# Altium PCB EC200U-PCB.PcbDoc (part 2 of 2)
Units mm, origin at the board's own origin, x right, y up, seen from the top; angles counter-clockwise.
Board outline 86.99 x 89.42 mm, 2 copper layers (Top Layer, Bottom Layer); 142 components, 97 nets, 668 pads, 129 vias.
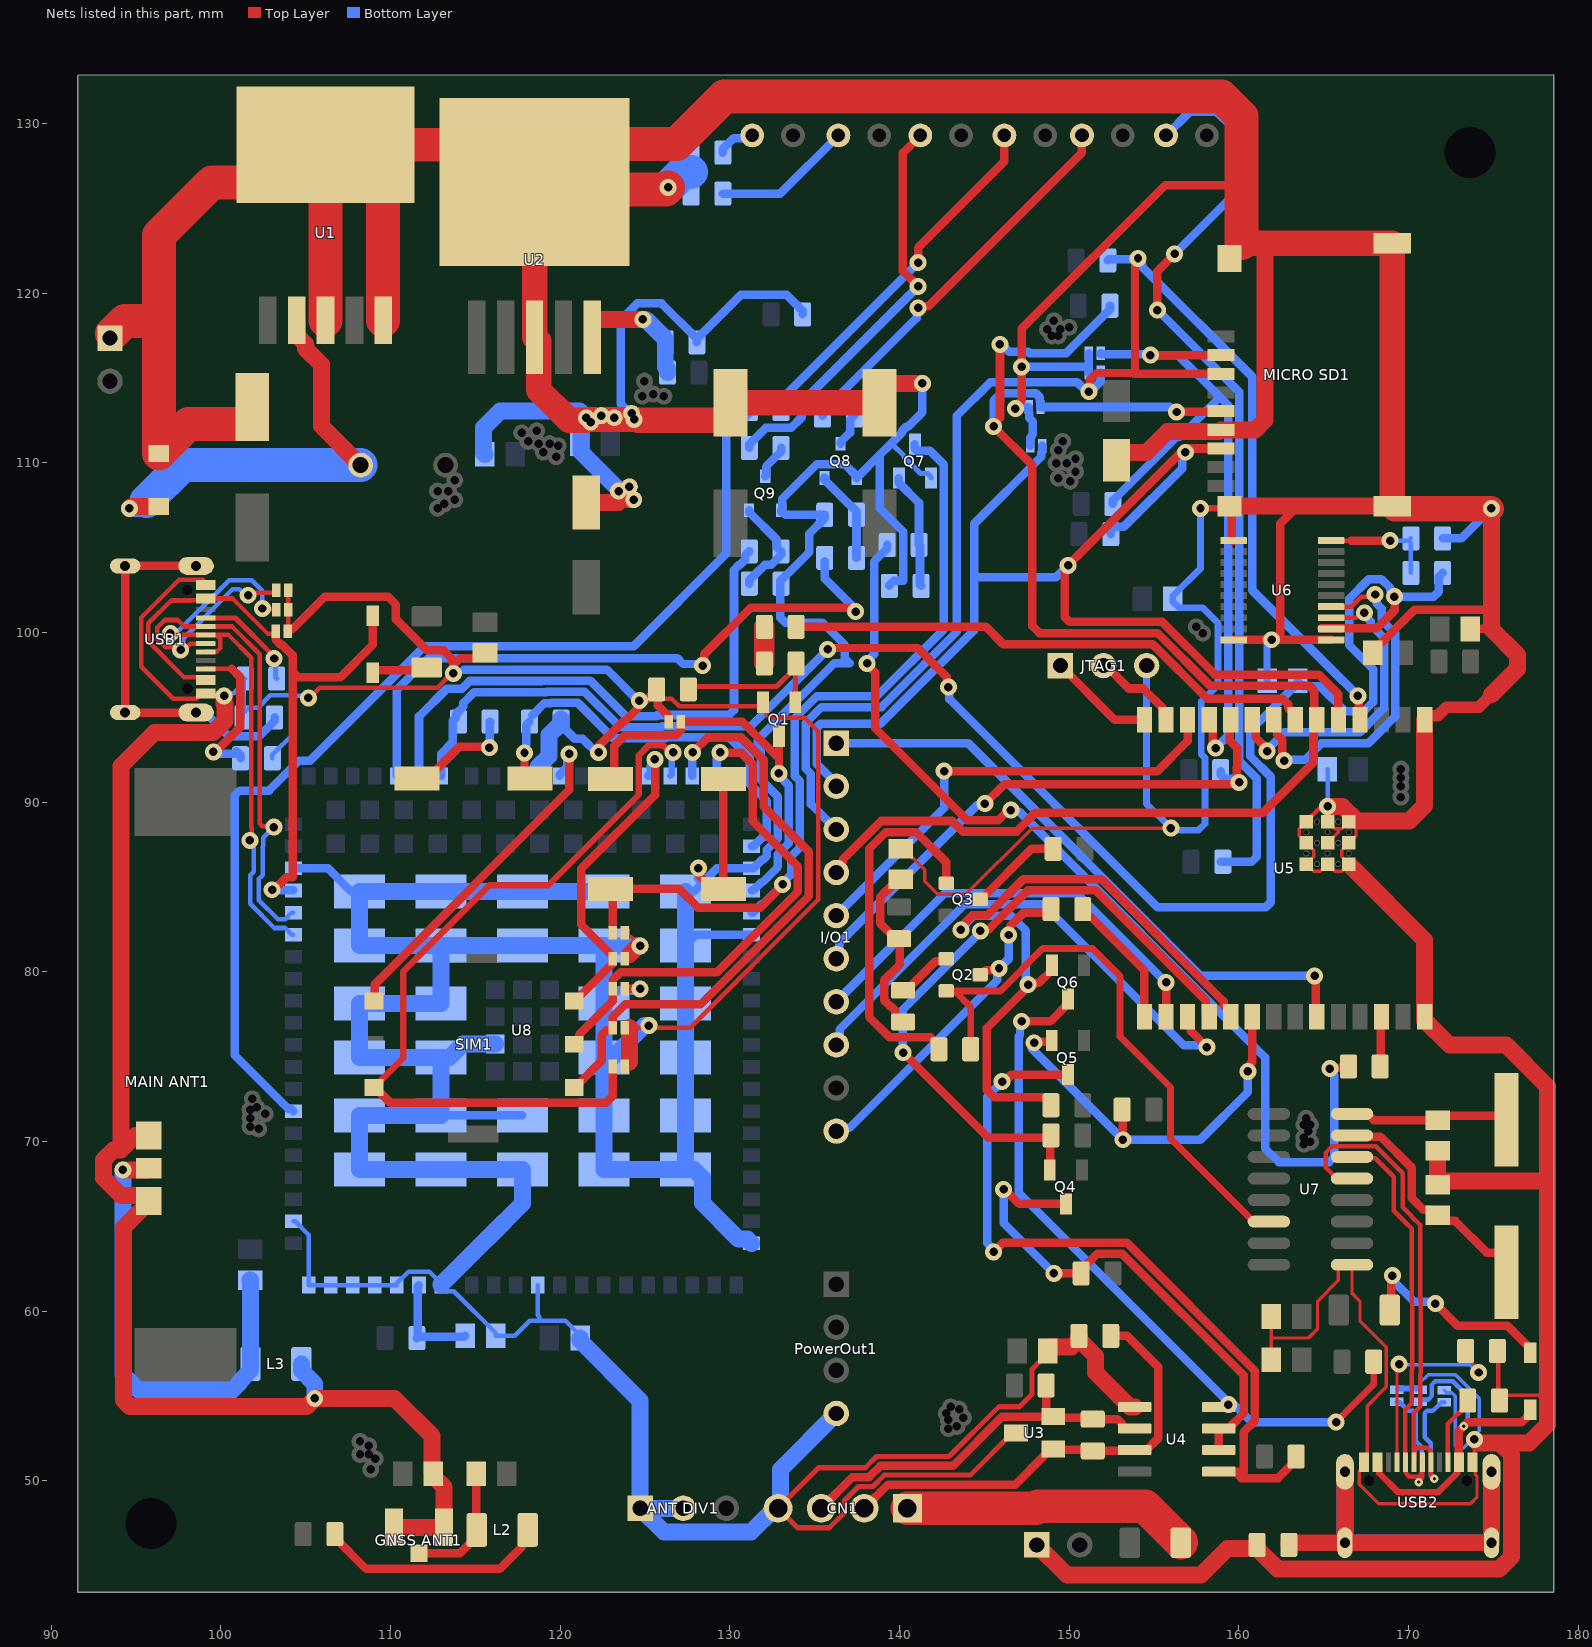
[diagram p2: the nets of this part, all layers, seen from the top]

## Via types
v1: diameter 1, hole 0.5, Top Layer to Bottom Layer, tented both sides, 126 vias
v2: diameter 0.5, hole 0.2, Top Layer to Bottom Layer, tented both sides, 3 vias

## Nets (pads, with @x,y where several pads share a name; then routed paths per layer and width w, separated by ;. In a path a pad name is that pad's centre, name@x,y a point inside that pad or via, vN(x,y) a via of type N, cw(c..) or ccw(c..) an arc to the next point about the centre after c; other vN are vias at no path point) (continued)
GND: "ANT DIV1.1" "ANT DIV1.2" "GNSS ANT1.1" "GNSS ANT1.2" "MAIN ANT1.2" "MAIN ANT1.3" "MICRO SD1.6" "MICRO SD1.10" "MICRO SD1.11" "MICRO SD1.12" "MICRO SD1.13" "Power 1.1" "Power 2.1" "POWER SW1.1" "RESET SW1.1" C1.1 C3.1 C4.2 C5.2 C6.2 C7.2 C8.2 C9.1 C10.2 C11.1 C12.1 C13.2 C14.2 C15.1 C16.2 C17.2 C18.1 C19.1 C20.1 C21.1 C22.1 C23.1 CN1.4 D1.A D2.1 D3.1 D4.1 D6.1 D7.1 D8.1 D9.1 D10.1 D11.1 D13.1 D14.1 D15.1 D16.1 D17.1 D18.1 D19.1 JTAG1.3 L3.1 pad.10 pad.11 pad.12 pad.13 pad.14 pad.15 pad.16 PowerOut1.4 Q1.2 Q7.2 Q8.2 Q9.2 R2.2 R13.1 R21.2 R22.1 R24.2 R27.2 R32.2 R35.2 R37.1 R38.2 R42.1 R43.1 R45.1 R46.1 R49.2 R50.2 R51.1 U1.3 U1.5 U1.6 U2.3 U2.6 U3.3 U4.5 U5.1 U5.28 U5.29_1 U5.29_2 U5.29_3 U5.29_4 U5.29_5 U5.29_6 U5.29_7 U5.29_8 U5.29_9 U6.1 U6.11 U6.20 U7.1 U8.8 U8.9 U8.19 U8.22 U8.36 U8.46 U8.48 U8.50 U8.51 U8.52 U8.53 U8.54 U8.56 U8.72 U8.76 U8.85 U8.86 U8.87 U8.88 U8.89 U8.90 U8.91 U8.92 U8.93 U8.94 U8.95 U8.96 U8.97 U8.98 U8.99 U8.100 U8.101 U8.102 U8.103 U8.104 U8.105 U8.106 U8.107 U8.108 U8.109 U8.110 U8.111 U8.112 USB1.A1_B12 USB1.B1_A12 USB2.A1_B12 USB2.B1_A12 | length 1108.3
  Top Layer w0.2: 93.472,117.348 93.599,117.475 93.599,117.602 ; D10.1@123.818,82.193 123.944,82.067 124.181,82.067 v1(124.714,81.534) ; D10.1@123.857,82.233 D10.1@123.921,82.296 ; C8.2@140.081,87.26 140.231,87.26 141.48,86.011 141.48,85.341 142.253,84.567 143.903,84.567 147.806,88.47 v1(155.988,88.47) ; C11.1@161.914,57.15 161.914,58.42 ; C12.1@161.914,59.69 161.914,58.42 ; U5.29_7@163.972,88.848 163.547,88.423 163.547,88.023 U5.29_8@163.972,87.598 164.397,87.173 164.397,86.773 U5.29_9@163.972,86.348 164.397,85.923 164.797,85.923 U5.29_6@165.222,86.348 165.647,85.923 166.047,85.923 U5.29_3@166.472,86.348 166.047,86.773 166.047,87.173 U5.29_2@166.472,87.598 166.897,88.023 166.897,88.423 U5.29_1@166.472,88.848 166.047,88.423 165.847,88.423 ; U5.29_5@165.222,87.598 165.847,88.223 165.847,88.423 ; U5.29_4@165.222,88.848 165.647,88.423 165.847,88.423 ; R22.1@175.352,54.737 175.67,55.055 177.634,55.055 177.78,54.909 177.78,67.678 ; 175.368,52.451 v1(173.874,52.451) 173.874,51.218 USB2.B1_A12@173.761,51.105 173.925,50.941 173.925,50.374 174.026,50.273 174.026,49.031 173.644,48.649 168.244,48.649 167.096,49.797 167.096,50.57 167.361,50.835 USB2.A1_B12@167.361,51.105 167.561,51.305 167.561,54.413 168.69,55.542 168.69,57.878 167.131,59.437 167.131,60.597 166.661,61.067 U7.1@166.661,62.738 166.092,62.738 165.861,62.507 165.861,61.827 164.631,60.597 164.631,58.953 164.098,58.42 161.914,58.42
  Top Layer w0.267: USB1.A1_B12@98.95,103.094 98.933,103.111 97.539,103.111 95.308,100.879 95.308,97.986 97.193,96.101 98.546,96.101 98.844,96.399 USB1.B1_A12@99.114,96.399 100.07,96.399 v1(100.203,96.266) ; D2.1@103.966,100.196 103.966,101.33 D3.1@103.982,101.346 D4.1@103.982,102.489 ; v1(105.156,96.139) 105.216,96.139 105.823,96.746 112.774,96.746 113.614,97.586 v1(113.701,97.586) ; D7.1@123.794,76.708 124.079,76.708 127.661,76.708 135.196,84.244 135.196,94.178 134.397,94.976 132.345,94.976 132.169,95.152 132.169,95.653 Q1.2@131.953,95.87 ; R2.2@125.684,96.445 126.051,96.079 126.585,96.079 127.01,95.653 131.737,95.653 Q1.2@131.953,95.87 ; Q1.2@131.953,95.885 Q1.2@131.953,95.87 ; U5.29_7@163.972,88.848 163.972,88.871 164.749,89.649 165.124,89.649 v1(165.227,89.752) ; C14.2@171.704,67.448 C14.2@171.958,67.448 ; R21.2@175.225,57.658 175.288,57.594 175.288,54.8 R22.1@175.352,54.737
  Top Layer w0.3: USB1.A1_B12@98.95,103.094 98.95,102.949 99.1,102.799 USB1.A1_B12@99.114,102.799 ; U3.3@146.855,52.832 146.655,52.832 144.16,50.337 139.094,50.337 138.432,49.675 137.584,49.675 136.721,48.812 136.721,48.1 135.858,47.237 133.992,47.237 CN1.4@132.842,48.387 135.23,50.775 137.977,50.775 138.639,51.437 142.916,51.437 145.848,54.369 147.07,54.369 147.816,55.115 147.816,56.596 148.728,57.508 C9.1@148.728,57.658
  Top Layer w0.4: v1(157.734,107.315) 159.313,107.315 159.437,107.439
  Top Layer w0.5: D2.1@103.951,100.076 103.951,100.196 103.966,100.196 104.221,100.196 106.133,102.108 109.855,102.108 110.325,101.638 110.325,100.774 112.163,98.936 113.129,98.936 113.605,98.46 113.605,98.297 113.701,98.201 ; v1(113.701,97.586) 113.701,98.201 ; C3.1@115.57,98.795 115.245,98.47 114.105,98.47 113.836,98.201 113.701,98.201 ; v1@122.27,93.307 123.721,94.758 123.795,94.758 v1@124.799,95.762 ; D8.1@123.794,78.994 v1(124.714,78.994) ; v1(124.662,95.975) 124.662,95.899 v1@124.799,95.762 ; R2.2@125.684,96.647 125.684,96.445 R2.2@125.684,96.437 ; D11.1@126.396,94.742 126.396,95.05 125.759,95.687 125.759,96.362 R2.2@125.684,96.437 ; v1@128.239,85.636 128.988,84.887 129.612,84.887 129.612,91.364 ; v1(146.824,113.184) 146.824,113.319 147.193,113.688 v1(147.193,115.642) 147.193,117.896 155.662,126.365 160.147,126.365 ; 159.437,107.439 159.563,107.313 159.563,105.459 159.608,105.414 U6.11@159.69,105.414 ; U6.20@159.69,99.564 v1@161.925,99.564 ; 162.433,99.564 U6.1@165.43,99.564 ; 162.433,99.568 162.433,106.423 163.449,107.439 ; C13.2@167.883,98.806 167.883,98.956 168.208,99.281 168.292,99.281 170.357,101.346 174.879,101.346 ; C16.2@173.62,100.203 174.879,100.203 ; v1@124.799,95.762 125.474,96.437 R2.2@125.684,96.437
  Top Layer w0.7: 171.513,95.093 171.725,95.093 172.225,95.593 174.143,95.593 174.879,96.329
  Top Layer w1: 95.758,70.358 94.967,70.358 94.118,69.509 ; v1(100.203,96.266) 100.203,95.807 100.244,95.766 100.244,94.792 99.556,94.104 96.093,94.104 94.118,92.129 94.118,69.509 ; 110.2,47.262 113.15,47.262 113.15,49.652 112.533,50.269 C1.1@112.533,50.419 112.458,50.494 112.458,52.642 110.236,54.864 v1(105.537,54.864) 105.046,54.373 94.648,54.373 94.267,54.754 94.267,64.932 95.508,66.173 95.508,66.823 94.111,66.823 93.084,67.85 93.084,68.924 93.67,69.509 94.118,69.509 ; C5.2@121.539,107.656 123.444,107.656 ; v1(123.444,108.331) pad.16@123.952,107.823 ; 124.079,74.676 124.079,76.708 ; 124.079,81.026 124.587,81.534 v1(124.714,81.534) ; PowerOut1.4@136.18,53.884 PowerOut1.4@136.271,53.975 ; C7.2@138.811,113.532 138.811,114.181 139.311,114.681 v1(141.351,114.681) ; 148.082,46.228 149.86,44.45 157.763,44.45 159.331,46.018 R27.2@161.071,46.018 ; C9.1@148.728,57.658 148.728,57.808 148.803,57.883 150.122,57.883 R13.1@150.576,58.337 ; R13.1@150.576,58.547 R13.1@150.576,58.337 ; C10.2@152.781,110.137 152.781,110.306 153.081,110.606 154.548,110.606 155.781,111.839 158.837,111.839 158.937,111.939 160.958,111.939 161.544,112.525 161.544,122.558 161.163,122.939 ; U4.5@153.862,54.356 153.582,54.356 151.546,56.392 151.546,57.367 R13.1@150.576,58.337 ; 159.437,107.439 163.449,107.439 169.037,107.439 ; R27.2@161.071,46.228 R27.2@161.071,46.018 ; v1(165.227,89.752) 166.11,89.752 166.962,88.9 170.053,88.9 170.942,89.789 U5.1@170.942,94.843 ; U5.29_3@166.672,86.148 170.942,81.878 U5.28@170.942,77.343 170.942,77.143 172.406,75.679 175.749,75.679 178.18,73.248 178.18,53.326 177.089,52.235 175.368,52.235 ; C14.2@171.704,67.448 C15.1@171.704,69.458 ; C14.2@171.958,67.448 172.188,67.678 177.78,67.678 ; v1(173.874,52.451) 174.09,52.235 175.368,52.235 ; 174.879,96.329 176.402,97.852 176.402,98.68 174.879,100.203 174.879,101.346 v1@174.879,107.289 ; R27.2@161.071,46.018 162.284,44.805 175.337,44.805 176.056,45.524 176.056,51.547 175.368,52.235
  Top Layer w1.5: U2.6@118.491,126.545 U2.3@118.491,117.399 118.731,117.159 118.731,114.284 120.507,112.508 pad.10@121.539,112.508 ; pad.10@121.64,112.548 v1(124.359,112.548) 124.547,112.548 124.587,112.508 129.798,112.508 130.048,112.758 C6.2@130.048,113.532 C7.2@138.811,113.532 ; 160.337,122.939 161.163,122.939 169.037,122.939 169.037,107.439 169.187,107.289 v1@174.879,107.289
  Top Layer w2: 93.599,117.602 94.361,118.364 96.349,118.364 ; C4.2@101.854,113.278 101.854,112.278 98.093,112.278 D1.A@96.349,110.534 96.349,118.364 ; U1.3@106.172,118.387 U1.6@106.172,128.737 ; U1.5@109.572,118.387 109.572,126.312 U1.6@107.147,128.737 ; v1(126.356,126.229) 126.238,126.111 118.925,126.111 U2.6@118.491,126.545 ; 160.147,122.939 160.147,126.365 160.147,130.4 158.975,131.572 129.667,131.572 126.873,128.778 120.724,128.778 U2.6@118.491,126.545 ; 96.349,118.364 96.349,123.4 99.47,126.521 103.956,126.521 U1.6@106.172,128.737 ; U1.6@106.172,128.737 U1.6@107.147,128.737 ; U1.6@107.147,128.737 116.299,128.737 U2.6@118.491,126.545
  Bottom Layer w0.2: D14.1@170.688,55.372 D15.1@169.291,55.372 169.441,55.522 170.694,55.522 170.694,55.805 171.147,56.258 172.761,56.258 174.162,54.857 174.162,52.956 173.874,52.667 v1(173.874,52.451) 173.743,52.451 173.243,51.951 172.852,51.951 172.735,52.068 172.735,54.995 172.539,55.191 172.235,55.191 D13.1@172.085,55.341
  Bottom Layer w0.267: v1(100.203,96.266) 100.343,96.406 100.761,96.406 R49.2@101.364,97.009 ; R50.2@101.3,94.996 101.3,95.198 R50.2@101.364,95.261 ; R49.2@101.427,97.282 101.364,97.218 R49.2@101.364,97.009 ; R51.1@103.043,92.583 103.043,92.793 104.292,94.042 104.292,96.266 105.029,96.266 v1(105.156,96.139) ; U8.56@104.28,65.293 104.38,65.293 105.18,64.493 U8.54@105.18,61.543 U8.53@106.48,61.543 U8.52@107.78,61.543 U8.51@109.08,61.543 U8.50@110.38,61.543 110.38,61.643 111.063,62.326 112.297,62.326 112.98,61.643 U8.48@112.98,61.562 ; 104.292,96.288 102.925,96.288 102.201,95.564 101.667,95.564 R50.2@101.364,95.261 ; U8.48@113.247,61.176 113.737,61.176 116.216,58.697 C23.1@116.216,58.547 117.327,58.547 118.209,59.428 118.745,59.428 ; U8.46@118.68,61.543 118.68,59.755 118.765,59.67 118.765,59.449 118.745,59.428 ; C21.1@121.169,58.42 121.169,58.57 120.311,59.428 118.745,59.428 ; 148.082,46.228 148.683,46.829 ; C17.2@165.216,91.948 165.227,91.937 v1(165.227,89.752) ; R50.2@101.364,95.261 R49.2@101.364,97.009
  Bottom Layer w0.3: 139.454,111.078 139.588,111.078 140.259,110.407 140.259,110.344 141.235,109.368 141.659,109.368 141.859,109.168 Q7.2@141.859,109.093
  Bottom Layer w0.4: JTAG1.3@154.559,98.044 154.559,89.899 v1(155.988,88.47) ; v1@156.083,88.519 156.246,88.356 156.474,88.356 156.481,88.348 157.625,88.348 158.003,88.726 158.003,92.599 157.773,92.829 157.773,95.898 158.77,96.895 158.77,100.546 157.86,101.456 156.469,101.456 156.094,101.831 C19.1@156.094,101.981 156.094,102.131 157.734,103.771 v1(157.734,107.315) ; C18.1@161.66,97.155 161.66,99.303 v1(161.925,99.568)
  Bottom Layer w0.5: U8.72@104.28,86.093 106.33,86.093 107.68,84.743 U8.108@108.18,84.743 ; U8.91@112.98,71.543 U8.92@117.78,71.543 ; 114.327,97.79 118.638,97.79 118.658,97.81 122.752,97.81 124.587,95.975 v1(124.662,95.975) ; U8.8@117.38,91.543 U8.9@118.68,91.543 ; R46.1@120.061,94.532 120.857,93.736 121.324,93.736 122.135,92.926 v1(122.27,92.926) ; U8.101@122.58,78.143 123.33,78.893 124.478,78.893 124.579,78.994 v1(124.714,78.994) ; pad.11@124.173,112.87 123.564,113.478 123.564,118.409 124.546,119.391 125.975,119.391 R45.1@128.062,117.304 ; U8.107@127.38,81.543 128.03,82.193 U8.22@131.28,82.193 ; U8.112@127.88,84.743 129.23,86.093 U8.19@131.28,86.093 131.38,86.093 131.88,86.593 131.946,86.593 132.18,86.827 132.18,87.208 132.83,87.858 132.83,90.319 131.83,91.319 131.83,92.99 131.638,93.182 131.638,93.674 136.14,98.176 137.072,98.176 136.779,98.469 136.779,99.256 135.451,100.584 133.262,100.584 132.969,100.877 132.969,103.034 133.265,103.33 133.272,103.33 134.69,104.748 134.69,105.824 135.59,106.724 R35.2@135.59,106.934 133.29,106.934 133.18,107.044 133.08,107.044 133.03,107.094 Q9.2@133.03,107.194 133.08,107.244 133.08,107.87 135.109,109.899 136.775,109.899 Q8.2@137.475,109.199 ; R45.1@128.062,117.094 R45.1@128.062,117.304 ; v1(128.143,86.106) 128.143,85.493 U8.112@128.397,85.493 ; R37.1@134.285,118.745 134.285,118.955 133.345,119.895 130.653,119.895 R45.1@128.062,117.304 ; Q8.2@137.475,109.099 Q8.2@137.475,109.199 ; R32.2@139.4,102.743 139.4,102.786 139.65,103.036 140.208,103.036 140.208,105.941 138.821,107.328 138.821,110.281 138.739,110.363 ; v1(141.351,114.681) 141.351,112.975 140.494,112.118 140.393,112.118 140.159,111.884 140.159,111.783 139.454,111.078 138.739,110.363 ; v1(146.824,113.184) 146.96,113.184 147.06,113.284 D19.1@147.605,113.284 147.605,112.988 147.637,112.956 147.637,112.643 147.86,112.419 147.86,111.673 147.751,111.564 147.751,111.511 147.701,111.461 D18.1@147.701,110.998 ; v1(147.193,115.642) D16.1@151.161,115.642 ; D16.1@151.161,115.316 D16.1@151.161,115.642 ; D17.1@151.161,116.459 D16.1@151.161,115.642 ; R24.2@172.004,105.537 173.101,105.537 v1(174.879,107.315) ; Q8.2@137.475,109.199 137.525,109.249 137.625,109.249 138.739,110.363
  Bottom Layer w1: L3.1@104.751,56.896 104.751,56.496 105.537,55.71 v1(105.537,54.864) ; U8.48@112.98,61.543 112.98,61.562 115.745,64.328 115.765,64.328 117.78,66.343 U8.87@117.78,68.343 U8.86@112.98,68.343 U8.85@108.18,68.343 U8.90@108.18,71.543 U8.91@112.98,71.543 U8.96@112.98,74.943 ; C22.1@115.559,110.49 115.484,110.565 115.484,112.063 116.458,113.037 121.151,113.037 v1(121.539,112.649) ; U8.76@116.18,75.743 114.28,75.743 113.48,74.943 U8.96@112.98,74.943 ; U8.9@118.68,91.543 118.68,92.062 119.341,92.723 119.341,93.946 119.927,94.532 120.061,94.532 R46.1@120.061,94.742 R46.1@120.061,94.913 ; C21.1@121.169,58.42 121.169,58.27 124.714,54.725 124.714,48.387 ; U8.111@122.58,84.743 U8.110@117.78,84.743 U8.109@112.98,84.743 U8.108@108.18,84.743 U8.103@108.18,81.543 U8.104@112.98,81.543 ; v1@123.483,108.37 pad.16@124.03,107.823 ; pad.16@124.333,107.823 pad.16@124.03,107.823 ; v1(124.359,112.548) 124.258,112.649 pad.13@123.19,112.649 v1(121.539,112.649) ; v1(124.714,81.534) 122.589,81.534 U8.106@122.58,81.543 ; v1(125.222,76.835) 124.972,76.835 123.08,74.943 U8.97@122.58,74.943 ; 127.254,48.387 124.714,48.387 ; U8.112@127.38,84.743 U8.107@127.38,81.543 U8.102@127.38,78.143 U8.98@127.38,74.943 U8.94@127.38,71.543 U8.89@127.38,68.343 ; U8.36@131.28,63.993 131.03,64.243 130.511,64.243 128.38,66.374 128.38,67.843 127.88,68.343 U8.89@127.38,68.343 ; PowerOut1.4@136.271,54.11 PowerOut1.4@136.271,53.975 132.976,50.68 132.976,48.521 CN1.4@132.842,48.387 132.653,48.387 131.253,46.987 126.114,46.987 124.714,48.387 ; U8.96@112.98,74.943 U8.95@108.18,74.943 U8.99@108.18,78.143 U8.100@112.98,78.143 U8.104@112.98,81.543 ; U8.104@112.98,81.543 U8.105@117.78,81.543 U8.106@122.58,81.543 ; v1(121.539,112.649) 121.222,112.332 121.222,110.631 pad.16@124.03,107.823 ; U8.97@122.58,74.943 U8.101@122.58,78.143 U8.106@122.58,81.543 ; U8.97@122.58,74.943 U8.93@122.58,71.543 U8.88@122.58,68.343 U8.89@127.38,68.343
  Bottom Layer w2: v1(126.356,126.229) 127.254,127.127 127.716,127.127
GPIO_N: JTAG1.2 U5.13 | length 5.3
  Top Layer w0.508: JTAG1.2@152.019,98.044 152.162,98.044 153.508,96.697 154.349,96.697 155.506,95.54 155.506,95.039 U5.13@155.702,94.843
GPIO_P: JTAG1.1 U5.14 | length 6.8
  Top Layer w0.508: JTAG1.1@149.415,98.54 149.531,98.425 JTAG1.1@149.86,98.425 ; JTAG1.1@149.479,98.044 152.68,94.843 U5.14@154.432,94.843
GPS_ON: R19.1 R33.1 | length 59.4
  Top Layer w0.5: v1(138.088,98.182) 138.088,98.108 138.557,97.639 138.557,94.361 143.999,88.919 145.807,88.919 146.423,89.535 v1(146.558,89.535) ; v1(165.354,74.295) 165.417,74.358 166.388,74.358 R19.1@166.451,74.422
  Bottom Layer w0.5: v1(138.088,98.182) 138.088,98.313 138.5,98.725 138.5,104.173 139.273,104.946 R33.1@139.273,105.156 ; v1(146.558,89.535) 146.654,89.439 147.057,89.439 161.544,74.952 161.544,69.596 162.353,68.787 165.307,68.787 165.608,69.088 165.608,73.906 165.354,74.16 v1(165.354,74.295)
GPS_RESET: R3.1 R4.2 | length 2.2
  Top Layer w1.2: R3.1@132.034,98.171 R4.2@132.034,100.33
IO8: I/O1.6 R26.2 U5.10 | length 33.3
  Top Layer w0.508: v1(145.034,89.916) 146.177,91.059 v1@160.004,91.059 ; U5.10@159.512,94.843 159.454,94.785 159.454,93.629 159.893,93.189 159.893,92.075 159.88,92.062 159.88,91.641 159.91,91.612 159.91,91.264 v1(160.004,91.17)
  Bottom Layer w0.508: I/O1.6@136.271,80.772 136.451,80.952 136.451,81.714 v1@144.559,89.822 ; R26.2@158.923,91.821 158.923,91.611 159.169,91.365 159.809,91.365 v1(160.004,91.17)
IO9: I/O1.10 Q2.3 R11.1 | length 20.7
  Top Layer w0.5: Q2.3@144.748,79.822 144.798,79.822 145.081,80.105 145.764,80.105 v1(145.859,80.2) ; v1(146.431,82.169) 146.527,82.265 146.527,82.69 147.32,83.483 148.715,83.483 R11.1@148.925,83.693
  Bottom Layer w0.5: I/O1.10@136.271,70.612 136.462,70.803 137.041,70.803 145.765,79.527 145.765,80.106 146.431,80.772 v1(146.431,82.169)
IO11: I/O1.5 U5.12 | length 27.5
  Top Layer w0.5: v1(142.621,91.821) 155.194,91.821 156.972,93.599 U5.12@156.972,94.843
  Bottom Layer w0.5: I/O1.5@136.271,83.312 142.621,89.662 v1(142.621,91.821)
KEY_POWER: "POWER SW1.2" D10.2 Q7.3 U8.21 | length 49.7
  Top Layer w0.5: D10.2@123.094,82.296 123.094,84.75 122.958,84.887 123.582,84.887 127.018,84.887 128.117,83.787 131.793,83.787 133.113,85.107 v1(133.113,85.148)
  Bottom Layer w0.5: U8.21@131.28,83.493 131.38,83.493 131.88,83.993 131.946,83.993 133.101,85.148 v1(133.113,85.148) ; v1@133.127,85.175 133.127,85.257 133.625,85.755 133.625,86.815 134.13,87.32 134.13,91.235 133.813,91.552 133.813,94.929 135.135,96.251 138.669,96.251 142.609,100.191 142.609,109.884 141.775,110.718 141.009,110.718 140.909,110.818 Q7.3@140.909,111.093
KEY_RESET: "RESET SW1.2" D11.2 Q1.3 U8.20 | length 23.9
  Top Layer w0.5: 122.958,91.364 123.19,91.596 123.19,93.307 123.835,93.952 125.97,93.952 125.98,93.942 126.812,93.942 127.096,94.226 D11.2@127.096,94.742 130.721,94.742 132.895,92.568 ; v1(132.887,91.694) 132.895,91.702 132.895,92.568 ; Q1.3@132.903,93.885 132.895,93.877 132.895,92.568
  Bottom Layer w0.5: U8.20@131.28,84.793 131.38,84.793 131.88,85.293 131.946,85.293 132.83,86.177 132.83,86.939 133.48,87.589 133.48,90.966 132.887,91.559 v1(132.887,91.694)
"MAX485 EN": Q4.2 R9.2 U5.18 | length 39.7
  Top Layer w0.5: v1(140.208,75.243) 145.22,70.231 R9.2@148.674,70.231 ; v1(144.762,82.418) 144.858,82.514 145.271,82.514 147.56,84.803 151.547,84.803 158.042,78.308 158.042,77.543 U5.18@158.242,77.343 ; Q4.2@148.849,68.326 148.887,68.364 148.887,70.32 R9.2@148.925,70.358
  Bottom Layer w0.5: v1(140.208,75.243) 140.193,75.258 140.193,77.779 144.762,82.348 v1(144.762,82.418)
"MAX485 IN": Q6.2 R10.2 U5.19 | length 42.2
  Top Layer w0.5: v1(143.613,82.472) 143.613,82.656 144.28,83.323 145.161,83.323 147.291,85.453 151.898,85.453 159.092,78.259 159.092,78.063 159.512,77.643 U5.19@159.512,77.343 ; R10.2@148.925,72.136 148.925,72.346 148.675,72.596 145.581,72.596 145.15,73.027 145.15,76.689 147.574,79.113 v1(147.574,79.248) 147.67,79.344 148.204,79.344 148.976,80.116 Q6.2@148.976,80.391
  Bottom Layer w0.5: v1(143.613,82.472) 143.613,82.542 144.389,83.318 146.555,83.318 147.447,82.426 147.447,79.502 147.574,79.375 v1(147.574,79.248)
"MAX485 OUT": Q5.2 R16.2 U5.20 | length 23.9
  Top Layer w0.5: v1(147.935,75.819) 147.998,75.882 148.907,75.882 Q5.2@148.971,75.946 ; R16.2@153.116,71.882 153.139,71.859 153.139,70.127 v1(153.162,70.104) ; v1(160.532,74.131) 160.628,74.227 160.628,74.522 160.782,74.676 U5.20@160.782,77.343
  Bottom Layer w0.5: v1(147.935,75.819) 147.839,75.723 147.839,75.512 147.797,75.469 v1(153.162,70.104) 157.717,70.104 160.532,72.919 v1(160.532,74.131)
MISO: "MICRO SD1.7" D18.2 I/O1.2 R28.1 U5.5 | length 75
  Top Layer w0.508: v1(149.929,103.955) 149.929,103.821 149.733,103.626 149.733,100.916 150.031,100.618 155.478,100.618 158.582,97.514 164.703,97.514 165.862,96.355 U5.5@165.862,94.843 ; v1@149.987,104.013 156.497,110.523 156.751,110.523 v1(156.845,110.617) ; v1@157.073,110.839 158.937,110.839
  Bottom Layer w0.508: I/O1.2@136.271,90.932 136.271,91.091 135.117,92.245 135.117,94.389 135.354,94.626 138.888,94.626 144.399,100.137 144.399,103.251 ; D18.2@148.401,110.998 148.401,110.636 148.359,110.594 148.359,110.369 144.399,106.409 144.399,103.251 ; v1(149.929,103.955) 149.225,103.251 144.399,103.251 ; R28.1@152.446,105.791 152.446,105.977 152.692,106.223 153.213,106.223 156.651,109.661 156.651,110.29 156.845,110.484 v1(156.845,110.617)
MOSI: "MICRO SD1.3" D16.2 I/O1.3 R30.1 U5.4 | length 91.2
  Top Layer w0.5: v1(151.159,114.188) 151.218,114.247 151.218,114.896 151.609,115.287 153.747,115.287 153.795,115.239 153.874,115.239 ; v1(154.051,122.047) 154.051,121.912 153.874,121.735 153.874,115.287 153.874,115.239 ; 158.937,115.239 153.874,115.239 ; v1(167.005,96.266) 167.069,96.203 167.069,94.907 U5.4@167.132,94.843
  Bottom Layer w0.5: I/O1.3@136.271,88.392 134.78,89.883 134.78,91.657 134.463,91.974 134.463,94.66 135.404,95.601 138.938,95.601 143.383,100.046 143.383,112.776 145.349,114.742 150.469,114.742 151.023,114.188 v1(151.159,114.188) ; v1@151.18,114.105 151.18,114.119 151.861,114.8 D16.2@151.861,115.316 ; R30.1@152.273,121.92 152.337,121.983 153.987,121.983 v1(154.051,122.047) 154.051,121.912 154.301,121.662 154.301,121.543 160.782,115.062 160.782,102.489 165.354,97.917 v1(167.005,96.266)
NET_MODE: R34.1 U8.5 | length 38.6
  Top Layer w0.5: v1(128.398,98.043) 128.494,98.139 128.494,98.712 131.222,101.44 137.069,101.44 137.279,101.23 v1(137.414,101.23)
  Bottom Layer w0.5: U8.5@110.38,91.543 110.38,96.634 112.232,98.486 126.898,98.486 127.245,98.139 128.302,98.139 v1(128.398,98.043) ; R34.1@135.59,104.184 135.59,103.17 137.414,101.346 v1(137.414,101.23)
NET_STATUS: R39.1 U8.6 | length 33.7
  Bottom Layer w0.508: U8.6@111.68,91.543 111.68,95.043 113.319,96.682 114.211,96.682 114.665,97.136 118.908,97.136 118.928,97.156 121.784,97.156 123.869,95.071 125.685,95.071 125.744,95.13 129.943,95.13 130.241,95.428 130.241,103.674 130.551,103.984 130.601,103.984 130.899,104.282 130.899,104.529 R39.1@131.145,104.775
NetC1_1: "MAIN ANT1.1" C24.1 L3.2 | length 27.4
  Top Layer w1: v1(94.234,68.326) 94.236,68.328 95.658,68.328 95.758,68.428
  Bottom Layer w1: v1(94.234,68.326) 94.234,56.273 95.148,55.359 100.686,55.359 101.067,55.74 101.067,55.812 101.751,56.496 L3.2@101.751,56.896 101.739,56.908 101.739,61.826 C24.1@101.727,61.838
NetC3_2: "GNSS ANT1.3" C2.2 L2.1 | length 7.5
  Top Layer w0.5: 111.675,45.737 114.106,45.737 115.086,46.717 L2.1@115.086,47.117 115.069,47.134 115.069,50.401 C2.2@115.051,50.419
NetC14_1: C8.1 R5.1 R6.2 | length 10.6
  Top Layer w0.5: R5.1@139.998,81.95 139.998,80.405 139.098,79.505 139.098,78.321 139.406,78.013 139.455,78.013 139.748,77.72 139.748,77.293 139.998,77.043 R6.2@140.208,77.043
  Top Layer w0.508: R5.1@139.976,81.95 139.766,81.95 138.862,82.854 138.862,84.414 139.221,84.773 139.244,84.773 139.931,85.46 C8.1@140.081,85.46
NetC20_1: C14.1 U7.7 Y1.2 | length 13.9
  Top Layer w0.5: U7.7@166.661,70.358 166.699,70.32 167.741,70.32 167.768,70.293 168.34,70.293 170.18,68.453 170.18,66.675 170.882,65.973 171.379,65.973 172.029,65.323 172.736,65.323 174.611,63.448 175.318,63.448 175.768,62.998 Y1.2@175.768,62.291
NetC21_2: C15.2 U7.8 Y1.1 | length 9.4
  Top Layer w0.5: U7.8@166.661,71.628 167.584,71.628 167.954,71.258 C15.2@171.704,71.258 ; C15.2@171.704,71.512 175.547,71.512 Y1.1@175.768,71.291
NetC23_2: C23.2 R48.2 U8.49 | length 6
  Bottom Layer w0.5: R48.2@111.552,58.42 111.615,58.483 114.353,58.483 C23.2@114.416,58.547 ; R48.2@111.616,58.484 111.616,61.479 U8.49@111.68,61.543
NetCN1_1: CN1.1 F2.1 | length 17.1
  Top Layer w2: CN1.1@140.462,48.387 148.03,48.387 148.148,48.505 154.46,48.505 156.572,46.393 F2.1@156.572,46.355
NetCN1_2: CN1.2 R13.2 R15.1 U3.1 U4.7 | length 26.9
  Top Layer w0.5: CN1.2@137.922,48.387 139.322,49.787 146.825,49.787 148.605,51.567 148.605,51.632 148.855,51.882 U3.1@149.055,51.882 149.111,51.826 151.328,51.826 R15.1@151.384,51.77 153.126,51.77 153.172,51.816 U4.7@153.862,51.816 154.552,51.816 155.247,52.511 155.247,56.716 153.416,58.547 R13.2@152.446,58.547
NetCN1_3: CN1.3 R8.1 R15.2 U3.2 U4.6 | length 23.1
  Top Layer w0.5: CN1.3@135.382,48.387 137.22,50.225 138.204,50.225 138.866,50.887 143.144,50.887 146.039,53.782 U3.2@149.055,53.782 149.126,53.711 151.313,53.711 R15.2@151.384,53.64 152.834,53.64 153.127,53.347 153.127,53.131 153.172,53.086 U4.6@153.862,53.086 ; R8.1@148.636,55.626 148.636,54.032 U3.2@148.886,53.782
NetD3_K: D1.K L1.2 U1.2 | length 26.5
  Top Layer w1: v1(94.615,107.315) 94.734,107.434 D1.K@96.349,107.434 D1.K@96.449,107.434 ; U1.2@104.472,118.387 104.497,118.362 104.497,117.487 104.997,116.987 104.997,116.718 105.933,115.782 105.933,112.166 L1.2@108.244,109.855
  Bottom Layer w1: v1(94.615,107.315) 95.631,107.315
  Bottom Layer w2: 95.631,107.744 97.742,109.855 L1.2@108.244,109.855
NetD12_A: D12.A D14.2 USB2.A4_B9 USB2.B4_A9 | length 19.3
  Top Layer w0.38: USB2.A4_B9@168.161,51.105 168.271,50.995 168.271,50.444 169.371,49.344 171.751,49.344 172.851,50.444 172.851,50.995 USB2.B4_A9@172.961,51.105
  Top Layer w0.5: USB2.B4_A9@172.974,51.314 172.974,51.412 172.961,51.425 172.961,52.946 173.482,53.467 176.672,53.467 177.165,53.96 D12.A@177.165,54.2
  Bottom Layer w0.267: D14.2@170.688,54.672 170.804,54.789 171.155,54.789 171.372,55.005 171.372,55.678 171.568,55.874 172.602,55.874 172.723,55.754 172.719,55.751 172.726,55.751 173.482,54.995 173.482,53.493 173.235,53.246 v2(173.235,53.22)
NetD12_C: D12.C F3.1 | length 12.6
  Top Layer w0.5: F3.1@168.891,60.071 168.964,60.144 168.964,62.03 v1(169.037,62.103) ; v1(171.577,60.452) 172.888,59.141 175.824,59.141 177.165,57.8 D12.C@177.165,57.56
  Bottom Layer w0.5: v1@168.783,62.103 v1(169.037,62.103) 169.037,61.849 170.338,60.548 171.481,60.548 v1(171.577,60.452)
NetD16_C: D5.C F1.1 | length 3.3
  Top Layer w0.5: D5.C@108.966,97.634 108.966,97.67 109.081,97.785 111.99,97.785 F1.1@112.141,97.936
"NetESP STATUS1_2": "ESP STATUS1.2" R25.1 | length 54.3
  Top Layer w0.5: v1(155.194,118.999) 155.194,121.285 v1(156.21,122.301)
  Bottom Layer w0.5: v1(155.194,118.999) 160.02,114.173 160.02,92.426 161.036,91.41 161.036,86.769 160.743,86.476 R25.1@158.92,86.476 ; 155.702,129.286 157.102,130.686 158.685,130.686 159.505,129.866 159.505,125.596 v1(156.21,122.301)
NetL2_2: L2.2 R1.1 | length 13.7
  Top Layer w0.5: R1.1@106.726,46.863 106.726,46.653 108.567,44.812 116.44,44.812 117.736,46.108 117.736,46.767 L2.2@118.086,47.117
NetLED1_2: LED2.2 R43.2 | length 2.3
  Bottom Layer w0.508: R43.2@129.586,128.27 129.586,128.48 130.221,129.115 131.147,129.115 LED2.2@131.318,129.286
NetLED2_2: LED1.2 R42.2 | length 8.2
  Bottom Layer w0.5: R42.2@129.586,125.857 132.969,125.857 LED1.2@136.398,129.286
"NetNET MODE1_2": "NET MODE1.2" R36.2 | length 23.1
  Top Layer w0.5: v1(141.098,119.125) 141.194,119.22 141.699,119.22 150.732,128.253 150.732,129.269 150.749,129.286
  Bottom Layer w0.5: R36.2@135.463,112.776 135.463,112.986 141.003,118.526 141.003,119.029 v1(141.098,119.125)
"NetNET STATUS1_2": "NET STATUS1.2" R40.2 | length 24.2
  Top Layer w0.5: v1(141.097,120.396) 140.197,121.296 140.197,128.259 141.224,129.286
  Bottom Layer w0.5: R40.2@131.145,110.871 131.145,111.081 132.111,112.047 133.607,112.047 134.239,112.679 134.239,113.538 v1(141.097,120.396)
NetQ1_1: Q9.1 R38.1 R39.2 | length 6.1
  Bottom Layer w0.5: Q9.1@131.13,107.194 131.13,107.094 132.765,105.459 132.765,105.025 R39.2@133.015,104.775 133.015,104.565 132.43,103.98 132.052,103.98 131.737,103.665 131.73,103.665 131.145,103.08 R38.1@131.145,102.87
NetQ1_3: Q9.3 R40.1 | length 2
  Bottom Layer w0.5: Q9.3@132.08,109.214 132.13,109.264 132.13,109.776 133.015,110.661 R40.1@133.015,110.871
NetQ2_1: Q8.1 R34.2 R35.1 | length 5.5
  Bottom Layer w0.508: Q8.1@135.575,109.099 135.575,108.999 137.184,107.39 137.214,107.39 137.46,107.144 R35.1@137.46,106.934 R34.2@137.46,104.394
NetQ2_3: Q8.3 R36.1 | length 2
  Bottom Layer w0.5: Q8.3@136.525,111.119 136.525,111.219 137.083,111.777 137.083,112.526 R36.1@137.333,112.776
NetQ3_1: Q7.1 R32.1 R33.2 | length 6.9
  Bottom Layer w0.508: Q7.1@139.959,109.093 139.959,108.818 141.143,107.634 R33.2@141.143,105.156 141.206,105.093 141.206,102.806 R32.1@141.27,102.743
NetQ4_1: Q1.1 R2.1 R3.2 | length 9.2
  Top Layer w0.3: R2.1@127.554,96.647 127.717,96.81 132.753,96.81 R3.2@133.879,97.936 ; R3.2@133.777,98.171 R3.2@133.817,98.13 ; Q1.1@133.853,95.885 133.879,95.91 R3.2@133.879,97.936 ; R3.2@133.904,98.171 133.879,98.146 R3.2@133.879,97.936
NetQ5_3: Q4.3 R14.2 U4.2 U4.3 | length 30.4
  Top Layer w0.5: v1(146.135,67.183) 146.189,67.183 147.046,66.326 Q4.3@149.799,66.326 ; v1(149.098,62.23) R14.2@150.703,62.23 150.703,62.44 151.643,63.38 153.125,63.38 160.274,56.231 160.274,53.975 159.547,53.248 159.547,53.131 159.502,53.086 U4.3@158.812,53.086 U4.2@158.812,51.816
  Bottom Layer w0.5: v1(146.135,67.183) 146.135,65.193 v1(149.098,62.23)
NetQ6_3: Q5.3 R17.2 U4.1 | length 45.4
  Top Layer w0.5: v1(145.542,63.5) 145.555,63.5 146.085,64.03 153.395,64.03 160.939,56.486 160.939,53.541 160.274,52.876 160.274,50.546 U4.1@159.766,50.546 ; v1(146.05,73.533) 146.185,73.533 146.582,73.93 149.821,73.93 149.837,73.946 Q5.3@149.921,73.946 ; U4.1@158.812,50.546 U4.1@159.766,50.546 ; R17.2@163.368,51.435 163.368,51.225 162.308,50.165 160.147,50.165 U4.1@159.766,50.546
  Bottom Layer w0.5: v1(145.542,63.5) 145.542,63.635 145.161,64.016 145.161,72.644 v1(146.05,73.533)
NetQ7_3: Q6.3 R18.2 U4.4 | length 42.1
  Top Layer w0.4: v1(165.73,53.462) 167.94,55.672 R18.2@167.94,57.023
  Top Layer w0.5: v1(147.193,77.078) 148.888,77.078 149.826,78.016 149.826,78.291 Q6.3@149.926,78.391
  Bottom Layer w0.5: v1(147.193,77.078) 147.097,76.982 147.097,76.254 147.035,76.192 147.035,66.96 159.374,54.621 v1(159.374,54.494) ; v1@159.7,54.494 160.732,53.462 v1(165.73,53.462)
NetQ8_1: Q2.1 R6.1 | length 3.3
  Top Layer w0.5: R6.1@140.208,78.913 140.418,78.913 142.127,80.622 142.598,80.622 Q2.1@142.748,80.772
NetQ9_1: Q3.1 R7.1 | length 21.9
  Top Layer w0.5: R7.1@142.321,75.438 142.321,75.648 141.826,76.143 139.406,76.143 138.208,77.341 138.208,87.245 138.956,87.993 138.956,88.001 139.19,88.235 140.972,88.235 142.748,86.459 Q3.1@142.748,85.217
NetQ9_3: Q3.3 R12.2 | length 5.7
  Top Layer w0.5: Q3.3@144.748,84.267 144.798,84.267 147.78,87.249 R12.2@149.208,87.249
NetR1_2: R41.2 STATUS1.2 | length 21.6
  Top Layer w0.5: v1(141.097,121.793) 141.097,122.682 146.177,127.762 STATUS1.2@146.177,129.286
  Bottom Layer w0.5: R41.2@133.015,113.157 133.265,113.407 133.265,113.961 v1(141.097,121.793)
NetR20_1: R44.1 R45.2 U2.5 | length 7.9
  Top Layer w1: U2.5@121.891,117.399 121.891,118.481 121.891,118.462 121.901,118.452 v1(124.88,118.452)
  Bottom Layer w1: v1(124.88,118.452) 125.044,118.452 126.192,117.304 126.192,115.653 126.319,115.526 R44.1@126.319,115.316
NetR29_2: R19.2 U5.26 | length 3
  Top Layer w0.5: R19.2@168.321,74.422 168.361,74.463 168.361,77.302 U5.26@168.402,77.343
NetR30_1: R4.1 U5.7 | length 32
  Top Layer w0.5: R4.1@133.904,100.33 145.083,100.33 146.107,99.306 154.923,99.306 158.126,96.103 162.557,96.103 162.902,95.759 162.902,95.563 163.322,95.143 U5.7@163.322,94.843
NetR33_2: R11.2 U5.15 | length 8
  Top Layer w0.5: R11.2@150.795,83.693 150.795,83.483 151.045,83.233 151.272,83.233 154.432,80.073 U5.15@154.432,77.343
NetR41_1: R23.1 R24.1 U6.10 | length 6.5
  Top Layer w0.267: U6.10@165.43,105.414 166.62,105.414
  Top Layer w0.5: 166.62,105.414 168.906,105.414 v1(168.91,105.41)
  Bottom Layer w0.267: v1(168.91,105.41) 170.007,105.41 R24.1@170.134,105.537 ; R23.1@170.134,103.505 170.134,103.715 R24.1@170.134,105.283
NetR43_2: R22.2 USB2.B5 | length 4.1
  Top Layer w0.267: USB2.B5@172.311,51.105 172.311,53.356 173.482,54.527 R22.2@173.482,54.737
NetR44_1: R21.1 USB2.A5 | length 12.3
  Top Layer w0.2: USB2.A5@169.311,51.105 169.311,56.755 v1(169.44,56.884) ; R21.1@173.355,57.658 173.74,57.273 173.74,56.921 174.117,56.543 v1(174.117,56.388)
  Bottom Layer w0.2: v1(169.44,56.884) 169.482,56.842 173.605,56.842 174.06,56.388 v1(174.117,56.388)
NetR45_1: R27.1 USB2.SH1 USB2.SH2 USB2.SH3 USB2.SH4 | length 37.4
  Top Layer w1: R27.1@162.941,46.228 162.941,46.355 USB2.SH3@166.241,46.355 ; USB2.SH1@166.241,50.535 USB2.SH3@166.241,46.355 ; USB2.SH2@174.881,50.535 USB2.SH4@174.881,46.355 USB2.SH3@166.241,46.355
  Bottom Layer w0.5: USB2.SH1@166.241,50.535 USB2.SH1@166.243,50.537
  Bottom Layer w1: USB2.SH1@166.241,50.535 USB2.SH3@166.241,46.355 USB2.SH4@174.881,46.355 USB2.SH2@174.881,50.535
NetR46_2: "USB BOOT SW1.1" R47.2 | length 6.6
  Top Layer w0.508: 111.561,91.389 112.185,91.389 114.054,93.258 115.784,93.258 v1(115.824,93.218)
  Bottom Layer w0.508: v1(115.824,93.218) 115.847,93.241 115.847,94.719 R47.2@115.87,94.742
NetR47_2: "USB BOOT SW1.2" R46.2 U8.115 | length 24.2
  Top Layer w0.5: v1(117.898,92.907) 117.898,91.707 118.215,91.389
  Bottom Layer w0.5: v1(117.898,92.907) 117.994,93.002 117.994,94.545 R46.2@118.191,94.742 ; R46.2@118.362,95.123 119.071,95.832 119.449,95.832 119.469,95.852 121.034,95.852 123.12,93.767 126.225,93.767 126.284,93.826 129.959,93.826 131.18,92.605 131.18,91.05 132.18,90.05 132.18,88.127 131.946,87.893 131.88,87.893 131.38,87.393 U8.115@131.28,87.393
NetR49_2: R51.2 USB1.B5 | length 9.4
  Top Layer w0.267: USB1.B5@99.114,97.849 99.131,97.866 100.635,97.866
  Top Layer w0.5: v1(99.57,92.954) 99.679,92.954 101.144,94.42 101.144,97.357 100.635,97.866
  Bottom Layer w0.5: v1(99.57,92.954) 99.666,92.858 100.923,92.858 100.923,92.995 101.173,92.745 R51.2@101.173,92.583
NetR50_1: R49.1 USB1.A5 | length 6.3
  Top Layer w0.3: USB1.A5@99.114,100.849 100.869,100.849 103.148,98.57 v1(103.148,98.463)
  Bottom Layer w0.3: v1(103.148,98.463) 103.223,98.389 103.223,97.356 R49.1@103.297,97.282
NetR51_1: R50.1 USB1.SH1 USB1.SH2 USB1.SH3 USB1.SH4 | length 22.8
  Top Layer w0.5: USB1.SH2@98.544,95.279 USB1.SH4@94.364,95.279 USB1.SH3@94.364,103.919 USB1.SH1@98.544,103.919
  Bottom Layer w0.5: USB1.SH2@98.544,95.279 99.069,95.279 100.462,93.886 102.27,93.886 103.17,94.786 R50.1@103.17,94.996
ONEWIRE: I/O1.1 U5.23 | length 36.3
  Top Layer w0.5: v1(164.465,79.756) 164.528,79.692 164.528,77.406 U5.23@164.592,77.343
  Bottom Layer w0.5: I/O1.1@136.271,93.472 144.048,93.472 157.764,79.756 v1(164.465,79.756)
RTS: Q2.2 R7.2 U7.14 | length 34.4
  Top Layer w0.4: Q2.2@142.748,78.872 143.251,78.872 ; R7.2@144.191,75.438 144.191,77.932 143.251,78.872 ; U7.14@161.761,65.278 160.861,65.278 155.963,70.176 155.963,73.198 152.982,76.179 152.982,79.755 151.371,81.366 148.431,81.366 145.937,78.872 143.251,78.872
RX_MAIN: U5.8 U6.4 | length 20.8
  Top Layer w0.267: U6.4@165.43,101.514 166.616,101.514 167.196,102.095 167.881,102.095 v1(168.021,102.235)
  Top Layer w0.5: U5.8@162.052,94.843 162.252,94.643 162.252,93.985 162.56,93.677 162.56,92.542 v1(162.655,92.446)
  Bottom Layer w0.5: v1(162.655,92.446) 162.695,92.485 163.888,92.485 164.859,93.456 167.622,93.456 169.205,95.04 169.205,99.938 168.408,100.735 168.408,101.41 168.117,101.701 168.117,102.139 v1(168.021,102.235)
SCK: "MICRO SD1.5" D19.2 I/O1.4 R29.1 U5.6 | length 95.6
  Top Layer w0.508: I/O1.4@136.271,85.852 136.271,86.12 136.642,86.491 136.642,86.604 138.302,88.264 138.302,88.272 138.919,88.889 143.104,88.889 143.728,88.265 146.888,88.265 147.998,89.374 161.419,89.374 164.396,92.351 164.396,94.647 U5.6@164.592,94.843 164.433,95.002 164.433,96.558 164.135,96.856 158.31,96.856 155.206,99.96 148.243,99.96 147.829,100.374 147.829,109.854 v1(145.542,112.141) 145.542,112.274 145.92,112.652 145.92,116.962 v1(145.912,116.97) ; v1(156.326,112.989) 156.351,113.014 158.912,113.014 158.937,113.039
  Bottom Layer w0.508: v1@145.542,112.186 145.542,113.658 145.972,114.088 148.022,114.088 148.259,113.851 148.259,113.626 148.301,113.584 148.301,113.288 D19.2@148.305,113.284 ; v1(145.912,116.97) 146.032,116.97 146.456,116.546 147.567,116.546 147.654,116.459 149.816,116.459 152.4,119.043 R29.1@152.4,119.253 ; D19.2@148.309,113.284 155.909,113.284 156.204,112.989 v1(156.326,112.989)
SCL: I/O1.7 U5.16 | length 26.3
  Top Layer w0.5: U5.16@155.702,77.343 v1(155.702,79.375)
  Bottom Layer w0.5: I/O1.7@136.271,78.232 142.657,84.618 150.459,84.618 v1(155.702,79.375)
SD_CS: "MICRO SD1.2" D17.2 R31.1 U5.11 | length 44.4
  Top Layer w0.5: v1(154.774,116.336) 158.387,116.336 158.937,116.339 ; U5.11@158.242,94.843 158.442,94.643 158.442,93.497 158.623,93.316 v1(158.623,93.181)
  Bottom Layer w0.5: D17.2@151.861,116.459 151.861,116.395 154.714,116.395 v1(154.774,116.336) 156.415,116.336 158.877,113.873 ; R31.1@152.573,107.569 152.573,107.779 156.311,111.517 156.521,111.517 158.877,113.873 ; v1(158.623,93.181) 159.37,93.928 159.37,113.38 158.877,113.873
SDA: I/O1.8 U5.17 | length 31.4
  Top Layer w0.5: U5.17@156.972,77.343 156.972,77.043 157.172,76.843 157.172,76.508 v1(158.115,75.565)
  Bottom Layer w0.5: I/O1.8@136.271,75.692 136.462,75.883 136.462,76.594 143.836,83.968 148.442,83.968 156.751,75.659 158.021,75.659 v1(158.115,75.565)
SIM_CLK: D7.2 SIM1.C3 U8.16 | length 35.5
  Top Layer w0.5: SIM1.C3@120.828,73.192 120.878,73.192 122.444,74.758 122.444,76.265 122.737,76.558 123.094,76.558 123.094,77.344 123.844,78.094 128.292,78.094 134.663,84.465 134.663,87.079 131.987,89.755 131.987,92.498 130.659,93.826 128.707,93.826 v1(127.807,92.926)
  Bottom Layer w0.5: U8.16@127.78,91.543 127.794,91.557 127.794,92.913 v1(127.807,92.926)
SIM_DATA: D6.2 SIM1.C7 U8.15 | length 48.3
  Top Layer w0.38: SIM1.C7@109.231,73.395 109.281,73.395 109.388,73.502 109.388,73.552 110.744,74.908 110.744,80.01 115.835,85.101 119.29,85.101 124.622,90.433 124.622,92.751 125.233,93.362 125.726,93.362 125.736,93.352 126.064,93.352 126.489,92.926 v1(126.657,92.926)
  Top Layer w0.508: SIM1.C7@109.231,73.395 SIM1.C7@109.028,73.192 109.078,73.192 109.982,72.288 122.707,72.288 123.094,72.675 D6.2@123.094,74.422
  Bottom Layer w0.38: U8.15@126.48,91.543 126.569,91.632 126.569,92.838 v1(126.657,92.926)
SIM_GND: SIM1.C5 U8.10 | length 20.8
  Top Layer w0.5: SIM1.C5@109.028,78.272 109.028,78.472 109.078,78.522 109.078,79.269 120.523,90.714 v1(120.523,92.837)
  Bottom Layer w0.5: U8.10@119.98,91.543 119.98,91.643 120.43,92.093 120.43,92.744 v1(120.523,92.837)
SIM_RST: D8.2 SIM1.C2 U8.17 | length 30.2
  Top Layer w0.5: SIM1.C2@120.828,75.732 120.878,75.732 121.128,75.982 121.128,76.303 123.094,78.269 D8.2@123.094,78.994 123.094,79.51 123.556,79.972 129.251,79.972 134.013,84.734 134.013,86.205 131.337,88.881 131.337,92.229 130.671,92.895 129.453,92.895 v1(129.421,92.926)
  Bottom Layer w0.5: U8.17@129.08,91.543 129.23,91.693 129.23,92.611 129.421,92.803 v1(129.421,92.926)
SIM_VCC: D9.2 SIM1.C1 U8.14 | length 18.9
  Top Layer w0.5: SIM1.C1@120.828,78.272 120.878,78.272 123.094,80.488 D9.2@123.094,80.772 123.094,80.922 121.233,82.783 121.233,86.07 125.589,90.426 125.589,92.513 v1(125.581,92.522)
  Bottom Layer w0.5: U8.14@125.18,91.543 125.33,91.693 125.33,92.136 125.581,92.387 v1(125.581,92.522)
STATUS: R41.1 U8.61 | length 64.1
  Bottom Layer w0.5: U8.61@104.28,71.793 104.13,71.943 103.964,71.943 100.817,75.09 100.817,90.385 101.11,90.678 102.849,90.678 104.614,92.443 105.27,92.443 112.014,99.187 124.333,99.187 129.78,104.634 129.78,111.582 131.145,112.947 R41.1@131.145,113.157
TX_MAIN: U5.9 U6.3 | length 18.4
  Top Layer w0.267: U6.3@165.43,100.864 166.893,100.864 167.188,101.159 v1(167.386,101.159)
  Top Layer w0.5: U5.9@160.782,94.843 160.982,94.643 160.982,93.817 161.653,93.146 v1(161.653,93.01)
  Bottom Layer w0.5: v1(161.653,93.01) 161.653,93.081 162.679,94.106 167.119,94.106 168.555,95.542 168.555,99.669 167.758,100.466 167.758,100.651 167.386,101.024 v1(167.386,101.159)
USB2_N: D15.2 U7.6 USB2.A7 USB2.B7 | length 29.1
  Top Layer w0.267: U7.6@166.661,69.088 166.726,69.023 168.023,69.023 169.126,67.921 169.126,65.917 169.821,65.222 169.835,65.222 170.17,64.887 170.17,60.5 170.224,60.446 170.224,56.559 170.17,56.505 170.17,54.577 169.801,54.208 169.801,51.115 USB2.B7@169.811,51.105 169.827,51.089 169.827,50.468 170.044,50.251 170.578,50.251 170.79,50.463 ; v2(170.596,49.934) 170.596,49.997 170.79,50.191 170.79,50.463 ; USB2.A7@170.811,51.105 170.794,51.089 170.794,50.468 170.79,50.463
  Bottom Layer w0.267: D15.2@169.291,54.672 169.441,54.672 169.975,54.139 170.265,54.139 170.421,53.982 170.421,52.352 170.774,51.999 170.774,50.175 170.596,49.997 v2(170.596,49.934)
USB2_P: D13.2 U7.5 USB2.A6 USB2.B6 | length 34.1
  Top Layer w0.267: U7.5@166.661,67.818 165.765,67.818 165.127,68.455 165.127,69.35 165.499,69.722 168.062,69.722 169.647,68.137 169.647,66.132 170.189,65.59 170.189,65.575 170.67,65.094 170.67,60.708 170.724,60.654 170.724,56.352 170.67,56.298 170.67,54.37 170.301,54.001 170.301,51.742 ; USB2.A6@170.311,51.105 170.328,51.122 170.328,51.742 170.544,51.959 171.078,51.959 171.295,51.742 171.295,51.122 USB2.B6@171.311,51.105 171.311,50.474 171.307,50.474 171.301,50.467 171.301,50.463 171.311,50.463 171.311,50.259 171.321,50.259 171.458,50.123 v2(171.521,50.123)
  Bottom Layer w0.267: v2(171.521,50.123) 171.521,50.17 171.295,50.396 171.295,52.215 170.942,52.568 170.942,53.982 171.098,54.139 171.432,54.139 171.935,54.641 D13.2@172.085,54.641
USB3_N: D4.2 U8.70 USB1.A7 USB1.B7 | length 37
  Top Layer w0.267: USB1.A7@99.114,99.349 98.694,99.349 98.677,99.333 98.195,99.333 97.837,98.975 v1(97.639,98.975) 97.499,99.115 96.754,99.115 96.244,99.624 96.244,100.274 96.703,100.733 97.46,100.733 97.843,100.349 98.901,100.349 99.751,100.349 100.661,100.349 102.293,98.717 102.293,88.737 102.449,88.581 103.071,88.581 v1(103.13,88.522) ; v1(101.61,102.19) 101.75,102.33 103.166,102.33 103.282,102.447 D4.2@103.282,102.489
  Bottom Layer w0.267: v1(97.639,98.975) 97.779,99.115 97.779,99.627 100.709,102.557 101.087,102.557 101.453,102.19 v1(101.61,102.19) ; v1(103.13,88.522) 102.501,87.893 102.501,87.421 102.467,87.388 102.467,85.69 102.248,85.471 102.248,84.224 103.369,83.103 103.791,83.103 104.18,83.493 U8.70@104.28,83.493
USB3_P: D3.2 U8.69 USB1.A6 USB1.B6 | length 33.6
  Top Layer w0.267: v1(97.028,99.949) 97.123,99.854 98.411,99.854 98.415,99.849 98.677,99.849 99.751,99.849 100.454,99.849 101.793,98.51 101.793,88.53 101.833,88.49 101.833,87.862 v1(101.717,87.746) ; USB1.B6@99.114,98.849 99.131,98.865 99.751,98.865 99.968,99.082 99.968,99.616 99.751,99.833 ; v1(102.454,101.409) 102.486,101.378 103.25,101.378 D3.2@103.282,101.346
  Bottom Layer w0.267: v1(97.028,99.949) 97.168,100.089 97.505,100.089 100.493,103.078 101.83,103.078 102.454,102.454 v1(102.454,101.409) ; v1@101.946,87.351 101.946,85.906 101.727,85.686 101.727,84.008 103.153,82.582 103.79,82.582 104.18,82.193 U8.69@104.28,82.193
USB_VBUS: D2.2 D5.A U8.71 USB1.A4_B9 USB1.B4_A9 | length 39.5
  Top Layer w0.267: USB1.B4_A9@99.114,97.199 98.844,97.199 98.677,97.366 97.833,97.366 95.725,99.474 95.725,100.531 97.074,101.881 98.296,101.881 98.313,101.898 99.013,101.898 USB1.A4_B9@99.114,101.999 100.693,101.999 102.757,99.935 103.134,99.935 D2.2@103.251,100.051
  Top Layer w0.5: v1(103.032,84.836) 103.132,84.836 103.869,85.573 104.242,85.573 104.242,97.654 ; D2.2@103.251,100.051 103.251,99.56 103.535,99.276 103.609,99.276 104.242,98.643 104.242,97.654 ; D5.A@108.966,100.994 108.966,99.28 107.047,97.361 104.535,97.361 104.242,97.654
  Bottom Layer w0.5: v1(103.032,84.836) 103.053,84.814 104.258,84.814 U8.71@104.28,84.793
VDD_EXTERNAL: C18.2 R23.2 R47.1 U6.2 U8.7 | length 102.6
  Top Layer w0.5: v1(135.767,98.995) 135.854,99.082 141.075,99.082 142.779,97.378 142.779,96.87 v1(142.875,96.774) ; U6.2@164.846,100.259 168.133,100.259 169.177,101.304 169.177,102.095 v1(169.164,102.108)
  Bottom Layer w0.5: U8.7@112.98,91.543 112.98,92.843 113.673,93.536 113.673,94.796 113.873,94.996 113.873,95.206 114.3,95.633 114.3,95.846 114.936,96.482 119.179,96.482 119.199,96.502 121.43,96.502 123.515,94.417 125.956,94.417 126.015,94.476 131.248,94.476 v1(135.767,98.995) ; v1(142.875,96.774) 142.941,96.708 142.941,96.073 155.205,83.809 161.582,83.809 161.875,84.102 161.875,91.491 160.67,92.696 160.67,94.215 163.46,97.005 C18.2@163.46,97.144 ; C18.2@163.46,97.155 C18.2@163.46,97.144 ; R23.2@172.004,103.505 171.771,103.272 171.771,102.401 171.478,102.108 v1(169.164,102.108) 169.164,102.243 168.921,102.486 168.921,102.608 168.394,103.135 167.648,103.135 166.486,101.973 166.486,99.262 167.905,97.842 167.905,95.893 167.378,95.366 166.238,95.366 164.785,96.819 163.785,96.819 C18.2@163.46,97.144
pads on no net: "MAIN ANT1.4" "MAIN ANT1.5" "MICRO SD1.1" "MICRO SD1.8" "MICRO SD1.CD" H1.MH H2.MH L2.0 L3.0 SIM1.C6 SIM1.MP1 SIM1.MP2 U5.22 U5.30_1 U5.30_2 U5.30_3 U5.30_4 U5.30_5 U5.30_6 U5.30_7 U5.30_8 U5.30_9 U5.30_10 U5.30_11 U5.30_12 U6.5 U6.6 U6.7 U6.8 U6.9 U6.12 U6.13 U6.14 U6.15 U6.16 U7.9 U7.10 U7.11 U7.12 U7.15 U8.1 U8.2 U8.3 U8.4 U8.11 U8.12 U8.13 U8.18 U8.23 U8.24 U8.25 U8.26 U8.27 U8.28 U8.29 U8.30 U8.31 U8.32 U8.33 U8.34 U8.37 U8.38 U8.39 U8.40 U8.41 U8.42 U8.43 U8.44 U8.45 U8.55 U8.62 U8.63 U8.64 U8.65 U8.66 U8.73 U8.74 U8.75 U8.77 U8.78 U8.79 U8.80 U8.81 U8.82 U8.83 U8.84 U8.113 U8.114 U8.116 U8.117 U8.118 U8.119 U8.120 U8.121 U8.122 U8.123 U8.124 U8.125 U8.126 U8.127 U8.128 U8.129 U8.130 U8.131 U8.132 U8.133 U8.134 U8.135 U8.136 U8.137 U8.138 U8.139 U8.140 U8.141 U8.142 U8.143 U8.144 USB1. USB1.A8 USB1.B8 USB2. USB2.A8 USB2.B8

## Silkscreen, mask and mechanical layers (free items; w line width, h text height)
Top Overlay:
  drawing of 19 lines, arcs and shapes, not listed
  text "Smart Truck V4.0" at 125.068,122.909 h0.5

## Text inside footprints (layer, text, board x,y; h text height)
H1: Top Overlay "3.0" at 97.282,44.958 h0.5 r45
H2: Top Overlay "3.0" at 175.006,125.73 h0.5 r45